# EAGLE board mcu_block.job (EAGLE 6.5.0)
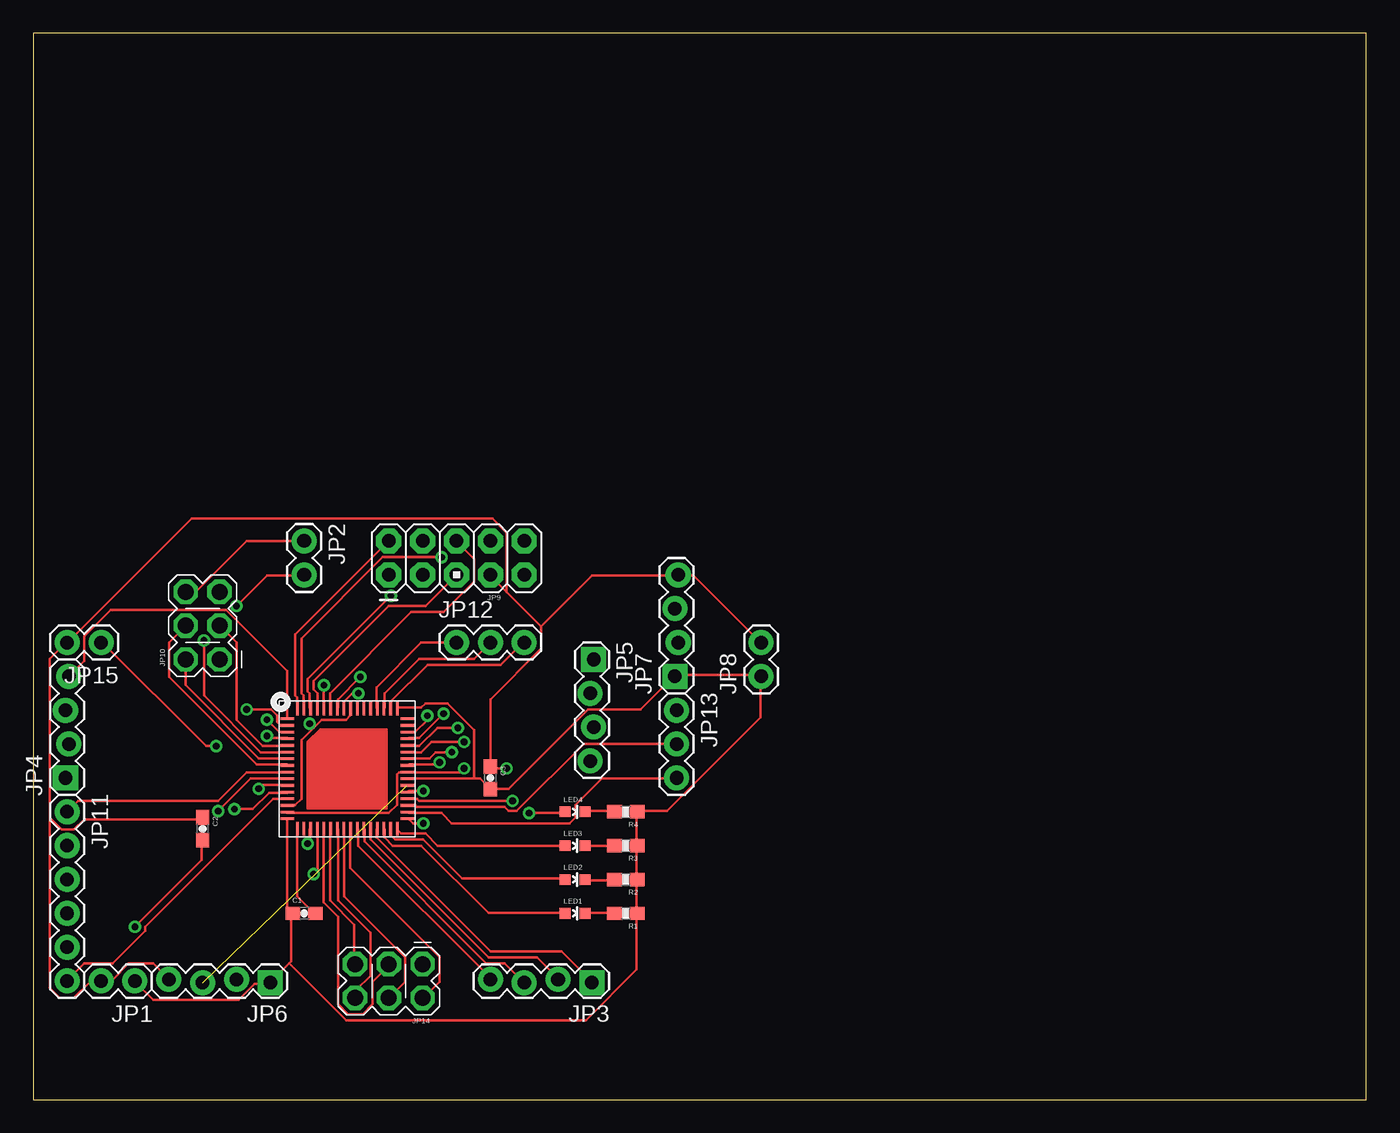
[diagram p0: board, top side]
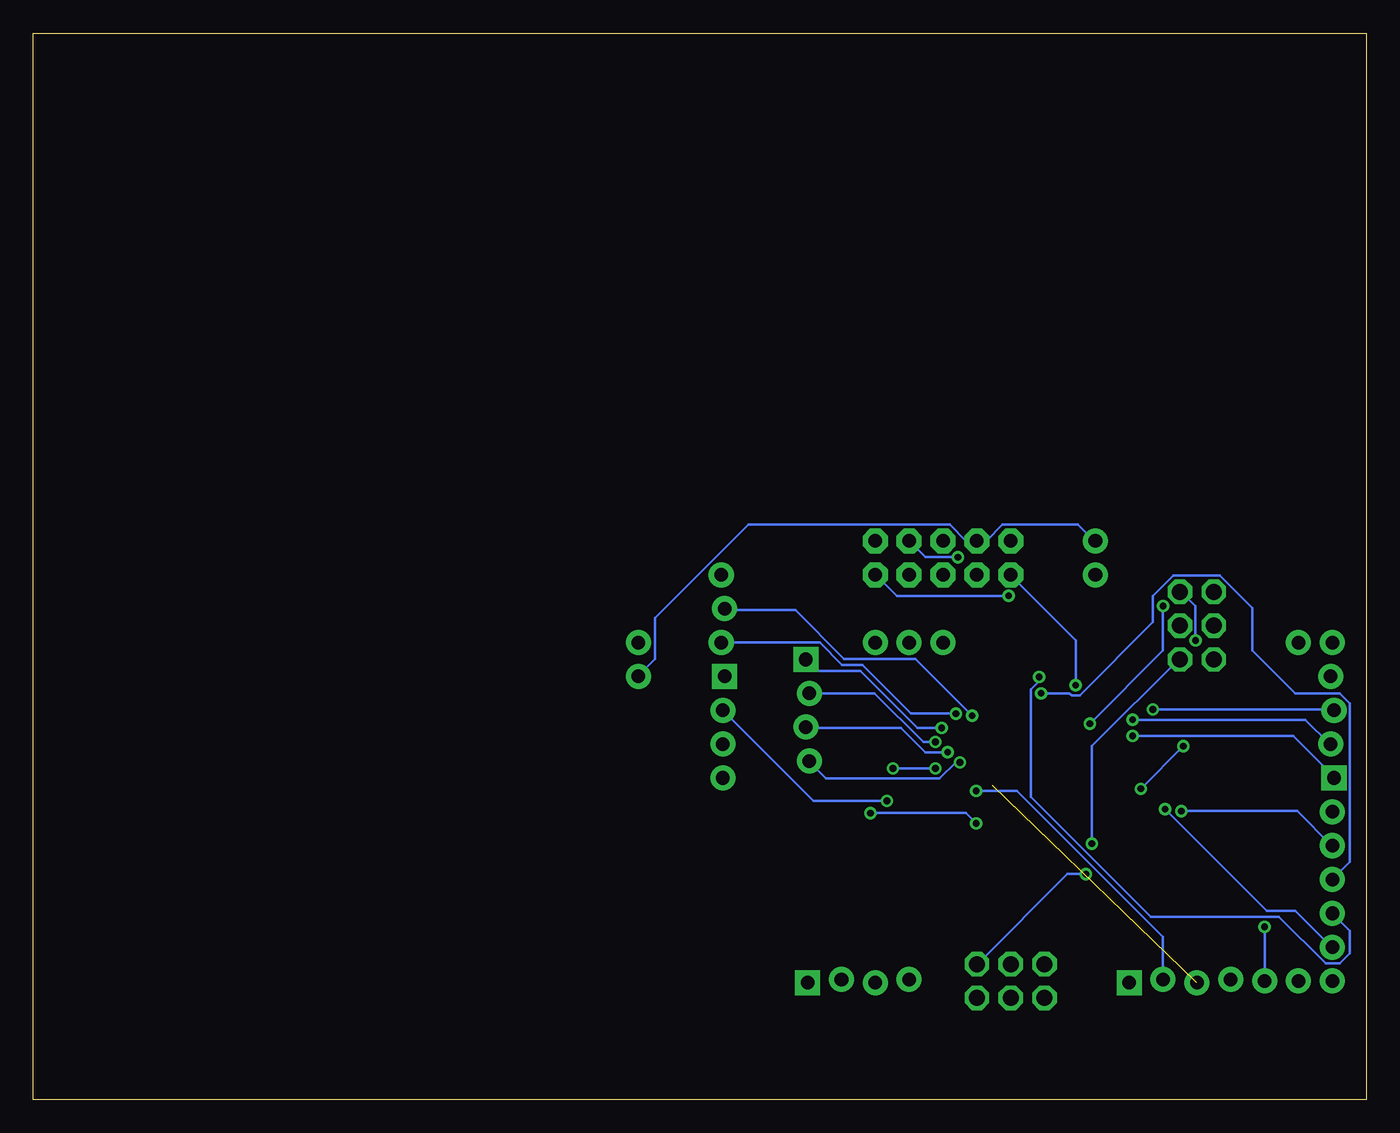
[diagram p1: board, bottom side, seen from below]

Size 100 x 80 mm. Coordinates in mm from the lower left corner, seen from the top.
Outline: 0,0 100,0 100,80 0,80 0,0
Copper layers (1*16): Top 0.035mm / dielectric 1.5mm / Bottom 0.035mm
Design rules "default *": minimum track width 8mil, minimum drill 20mil, track to track 6mil, track to pad 6mil, pad to pad 6mil, via to via 8mil, smd to smd 6mil, copper to edge 40mil, drill to drill 8mil, minimum pad ring 10mil, minimum via ring 8mil, stop-mask expansion 3mil, vias tented up to drill 0mil, thermal gap 10mil

## Footprints (pad centres in the part's own frame; a part is rotated, then mirrored left to right if it is on the bottom)
0603-CAP = smd 1.1 x 1: 1 -0.85,0; 2 0.85,0
1X02 = drill 1.016 pad 1.88: 1 0,0; 2 2.54,0
1X04_LOCK = drill 1.016 pad 1.88 square: 1 0,0.127 | drill 1.016 pad 1.88: 2 2.54,-0.127; 3 5.08,0.127; 4 7.62,-0.127
AVR_ICSP = drill 1.016 pad 1.88 octagon: 1 -1.27,5.08; 2 1.27,5.08; 3 -1.27,2.54; 4 1.27,2.54; 5 -1.27,0; 6 1.27,0; 7 -1.27,-2.54; 8 1.27,-2.54; 9 -1.27,-5.08; 10 1.27,-5.08
2X3_POGO = drill 1.2 pad 1.829 octagon: P$1 0,0; P$2 0,2.54; P$3 2.54,0; P$4 2.54,2.54; P$5 5.08,0; P$6 5.08,2.54
1X06 = drill 1.016 pad 1.88: 1 0,0; 2 2.54,0; 3 5.08,0; 4 7.62,0; 5 10.16,0; 6 12.7,0
1X03 = drill 1.016 pad 1.88: 1 0,0; 2 2.54,0; 3 5.08,0
LED-0603 = smd 0.8 x 0.8: A 0,-0.75; C 0,0.75
0603-RES = smd 1.1 x 1: 1 -0.85,0; 2 0.85,0
VQFN_RGC_64PIN = smd 1 x 0.2: 1 0,8.25; 2 0,7.75; 3 0,7.25; 4 0,6.75; 5 0,6.25; 6 0,5.75; 7 0,5.25; 8 0,4.75; 9 0,4.25; 10 0,3.75; 11 0,3.25; 12 0,2.75; 13 0,2.25; 14 0,1.75; 15 0,1.25; 16 0,0.75; 33 9,0.75; 34 9,1.25; 35 9,1.75; 36 9,2.25; 37 9,2.75; 38 9,3.25; 39 9,3.75; 40 9,4.25; 41 9,4.75; 42 9,5.25; 43 9,5.75; 44 9,6.25; 45 9,6.75; 46 9,7.25; 47 9,7.75; 48 9,8.25 | smd 0.2 x 1: 17 0.75,0; 18 1.25,0; 19 1.75,0; 20 2.25,0; 21 2.75,0; 22 3.25,0; 23 3.75,0; 24 4.25,0; 25 4.75,0; 26 5.25,0; 27 5.75,0; 28 6.25,0; 29 6.75,0; 30 7.25,0; 31 7.75,0; 32 8.25,0; 49 8.25,9; 50 7.75,9; 51 7.25,9; 52 6.75,9; 53 6.25,9; 54 5.75,9; 55 5.25,9; 56 4.75,9; 57 4.25,9; 58 3.75,9; 59 3.25,9; 60 2.75,9; 61 2.25,9; 62 1.75,9; 63 1.25,9; 64 0.75,9

## Placement (x,y rotation side)
C1  470nF  [0603-CAP]  20.32,13.97 0 top
C2  0.1uF  [0603-CAP]  12.7,20.32 270 top
C3  0.1uF  [0603-CAP]  34.29,24.13 270 top
JP1  M02PTH  [1X02]  7.62,8.89 180 top
JP2  M02PTH  [1X02]  20.32,41.91 270 top
JP3  [1X04_LOCK]  41.91,8.89 180 top
JP4  [1X04_LOCK]  2.54,24.13 90 top
JP5  [1X04_LOCK]  41.91,33.02 270 top
JP6  [1X04_LOCK]  17.78,8.89 180 top
JP7  [1X04_LOCK]  48.26,31.75 90 top
JP8  M02PTH  [1X02]  54.61,31.75 90 top
JP9  M05X2PTH  [AVR_ICSP]  31.75,40.64 90 top
JP10  [2X3_POGO]  13.97,33.02 90 top
JP11  [1X06]  2.54,21.59 270 top
JP12  [1X03]  31.75,34.29 0 top
JP13  [1X03]  48.26,29.21 270 top
JP14  [2X3_POGO]  29.21,10.16 180 top
JP15  M02PTH  [1X02]  5.08,34.29 180 top
LED1  [LED-0603]  40.64,13.97 270 top
LED2  [LED-0603]  40.64,16.51 270 top
LED3  [LED-0603]  40.64,19.05 270 top
LED4  [LED-0603]  40.64,21.59 270 top
R1  1.5K  [0603-RES]  44.45,13.97 180 top
R2  1.5K  [0603-RES]  44.45,16.51 180 top
R3  1.5K  [0603-RES]  44.45,19.05 180 top
R4  1.5K  [0603-RES]  44.45,21.59 180 top
U$1  MSP430F5528  [VQFN_RGC_64PIN]  19.05,20.32 0 top

## Library data of the parts
C1-C3 = SparkFun-Capacitors
JP1-JP9 JP11-JP13 JP15 = SparkFun-Connectors
JP10 JP14 = SparkFun-Connectors; PROD_ID: HW-11044
LED1-LED4 = SparkFun-LED
R1-R4 = SparkFun-Passives
U$1 = TuansLib

## Nets
ADC_0: JP4.4 U$1.1
ADC_1: JP4.3 U$1.2
ADC_2: JP4.2 U$1.3
ADC_3: JP4.1 U$1.4
AGND: JP2.2 U$1.14 U$1.56
AVCC: JP15.1 U$1.11
BTN_0: JP3.4 U$1.26
BTN_1: JP3.3 U$1.27
BTN_2: JP3.2 U$1.28
BTN_3: JP3.1 U$1.29
DGND: C1.1 C2.2 C3.2 JP1.1 JP2.1 JP6.1 JP7.1 JP8.1 JP9.4 JP10.P$6 R1.1 R2.1 R3.1 R4.1 U$1.16 U$1.39 U$1.49
DISP_BORDER: JP10.P$2 U$1.7
DISP_BUSY: JP10.P$3 U$1.5
DISP_DISCHRG: JP10.P$4 U$1.8
DISP_PWM: JP10.P$1 U$1.19
DISP_RST: JP10.P$5 U$1.6
LED_0: LED1.A U$1.30
LED_1: LED2.A U$1.31
LED_2: LED3.A U$1.32
LED_3: LED4.A U$1.33
N$1: C1.2 U$1.17
N$2: LED4.C R4.2
N$3: JP9.3
N$4: JP11.1 U$1.9
N$5: JP11.2 U$1.10
N$6: JP11.3 U$1.57
N$7: JP11.4 U$1.58
N$8: JP11.5 U$1.12
N$9: JP11.6 U$1.13
N$10: JP12.3 U$1.50
N$11: JP9.10
N$12: JP12.2 U$1.51
N$13: JP12.1 U$1.52
N$14: JP13.1 U$1.36
N$15: JP13.2 U$1.35
N$16: JP13.3 U$1.34
N$17: LED3.C R3.2
N$18: LED2.C R2.2
N$19: LED1.C R1.2
PWR_CE: JP14.P$1 U$1.20
PWR_FPWM: JP14.P$3 U$1.21
PWR_ISET2: JP14.P$4 U$1.24
PWR_PG: JP14.P$2 U$1.25
PWR_STAT1: JP14.P$5 U$1.22
PWR_STAT2: JP14.P$6 U$1.23
RST/NMI/SBWTDIO: JP9.2 U$1.64
SPI_CLK: JP5.1 U$1.44
SPI_MISO: JP5.2 U$1.43
SPI_MOSI: JP5.3 U$1.42
SPI_STE: JP5.4 U$1.41
TCK: JP9.8 U$1.63
TDI: JP9.5 U$1.61
TDO: JP9.1 U$1.60
TEST/SBWTCK: JP9.6 U$1.59
TMS: JP9.9 U$1.62
USART0_RX: JP6.3 U$1.38
USART0_TX: JP6.2 U$1.37
USART1_RX: JP7.3 U$1.46
USART1_TX: JP7.2 U$1.45
VCC: C2.1 C3.1 JP1.2 JP6.4 JP7.4 JP8.2 JP9.7 JP15.2 U$1.15 U$1.40

## Tracks (layer width: path | path; a pad name or v marks a point on that pad's centre or on a via)
ADC_0
  Top 0.203: U$1.1 19.05,32.16 14.48,36.73 5.79,36.73 3.81,34.75 3.81,32.92 2.74,31.85 JP4.4
ADC_1  (via drill 0.51)
  Top 0.203: v16,29.26 17.83,29.26 18.29,28.8 18.29,28.35 18.59,28.04 19.05,28.04 U$1.2
  Bottom 0.203: v16,29.26 2.44,29.26 JP4.3
ADC_2  (via drill 0.51)
  Top 0.203: v17.53,28.5 18.44,27.58 19.05,27.58 U$1.3
  Bottom 0.203: v17.53,28.5 4.57,28.5 2.74,26.67 JP4.2
ADC_3  (via drill 0.51)
  Top 0.203: v17.53,27.28 17.68,27.13 19.05,27.13 U$1.4
  Bottom 0.203: v17.53,27.28 5.49,27.28 2.44,24.23 JP4.1
AGND  (via drill 0.51)
  Top 0.203: 21.03,27.89 21.64,28.5 23.47,28.5 23.77,28.8 23.77,29.26 U$1.56 | 21.03,27.89 20.12,26.98 20.12,22.55 19.66,22.1 19.05,22.1 U$1.14 | v15.24,37.03 17.53,39.32 20.27,39.32 JP2.2 | 21.03,27.89 v20.73,28.19
  Bottom 0.203: v15.24,37.03 15.24,33.68 v20.73,28.19
AVCC  (via drill 0.51)
  Top 0.203: v16.92,23.32 17.22,23.62 19.05,23.62 U$1.11 | v13.72,26.52 12.95,26.52 5.18,34.29 JP15.1
  Bottom 0.203: v13.72,26.52 v16.92,23.32
BTN_0
  Top 0.203: U$1.26 24.38,20.27 24.38,19.05 34.29,9.14 JP3.4
BTN_1
  Top 0.203: U$1.27 24.84,20.27 24.84,19.36 33.98,10.21 35.36,10.21 36.73,8.84 JP3.3
BTN_2
  Top 0.203: U$1.28 25.3,20.27 25.3,19.51 34.14,10.67 37.8,10.67 39.32,9.14 JP3.2
BTN_3
  Top 0.203: U$1.29 25.76,20.27 25.76,19.66 34.29,11.12 39.62,11.12 41.91,8.84 JP3.1
DGND  (via drill 0.51)
  Top 0.203: JP10.P$6 12.19,38.1 16,41.91 JP2.1 | U$1.16 19.05,14.33 19.36,14.02 C1.1 19.36,13.87 19.36,10.36 19.2,10.21 | 19.2,10.21 17.83,8.84 JP6.1 17.68,8.69 16.61,8.69 15.39,7.47 8.99,7.47 7.62,8.84 JP1.1 | v7.62,12.95 12.65,17.98 12.65,19.36 C2.2 | 33.07,24.08 33.53,24.08 34.29,23.32 | 33.07,24.08 28.19,24.08 U$1.39 | 33.07,24.08 33.07,27.74 31.09,29.72 29.41,29.72 29.11,29.41 27.28,29.41 U$1.49 | 45.26,19.05 45.26,21.49 R4.1 45.41,21.64 47.55,21.64 54.56,28.65 54.56,31.7 JP8.1 54.56,31.85 48.16,31.85 JP7.1 48.01,31.7 45.57,29.26 41.6,29.26 35.66,23.32 34.29,23.32 | 45.26,19.05 45.26,16.61 R2.1 45.26,16.46 45.26,14.02 R1.1 45.26,13.87 45.26,9.75 41.45,5.94 23.47,5.94 19.2,10.21 | 45.26,19.05 R3.1 | 34.29,23.32 C3.2
  Bottom 0.203: JP2.1 20.42,41.91 21.64,43.13 27.28,43.13 28.5,41.91 JP9.4 30.02,41.91 31.24,43.13 46.33,43.13 53.34,36.12 53.34,33.07 54.56,31.85 JP8.1 | JP1.1 v7.62,12.95
DISP_BORDER
  Top 0.203: JP10.P$2 11.43,31.09 16.92,25.6 19.05,25.6 U$1.7
DISP_BUSY
  Top 0.203: JP10.P$3 15.24,34.29 15.24,28.5 17.22,26.52 19.05,26.52 U$1.5
DISP_DISCHRG
  Top 0.203: U$1.8 19.05,25.15 16.76,25.15 10.21,31.7 10.21,34.29 11.43,35.51 JP10.P$4
DISP_PWM  (via drill 0.51)
  Top 0.203: v20.57,19.2 20.73,19.36 20.73,20.27 U$1.19
  Bottom 0.203: v20.57,19.2 20.57,26.52 14.02,33.07 JP10.P$1
DISP_RST  (via drill 0.51)
  Top 0.203: v12.8,34.44 12.8,30.33 17.07,26.06 U$1.6
  Bottom 0.203: v12.8,34.44 12.8,37.03 13.87,38.1 JP10.P$5
LED_0
  Top 0.203: LED1.A 39.78,14.02 34.14,14.02 29.11,19.05 26.98,19.05 26.36,19.66 26.36,20.27 U$1.30
LED_1
  Top 0.203: LED2.A 39.78,16.61 32.16,16.61 29.26,19.51 27.13,19.51 26.82,19.81 26.82,20.27 U$1.31
LED_2
  Top 0.203: LED3.A 30.33,19.05 29.41,19.96 27.58,19.96 27.28,20.27 U$1.32
LED_3  (via drill 0.51)
  Top 0.203: v37.19,21.49 39.78,21.49 LED4.A | v29.26,20.73 28.5,20.73 28.19,21.03 U$1.33
  Bottom 0.203: v37.19,21.49 30.02,21.49 v29.26,20.73
N$1
  Top 0.203: U$1.17 19.81,20.27 19.81,15.24 21.03,14.02 C1.2
N$2
  Top 0.203: LED4.C 41.45,21.64 43.59,21.64 R4.2
N$4
  Top 0.203: JP11.1 3.35,22.4 13.87,22.4 16,24.54 19.05,24.54 U$1.9
N$5  (via drill 0.51)
  Top 0.203: v13.87,21.64 16.31,24.08 U$1.10
  Bottom 0.203: v13.87,21.64 5.18,21.64 2.59,19.05 JP11.2
N$6  (via drill 0.51)
  Top 0.203: v24.38,30.48 23.93,30.48 23.32,29.87 23.32,29.41 U$1.57
  Bottom 0.203: v24.38,30.48 22.25,30.48 22.1,30.33 21.49,30.33 16,35.81 16,37.8 14.48,39.32 10.97,39.32 8.53,36.88 8.53,33.68 5.33,30.48 1.98,30.48 1.22,29.72 1.22,17.83 JP11.3
N$7  (via drill 0.51)
  Top 0.203: v24.54,31.7 22.86,30.02 22.86,29.41 U$1.58
  Bottom 0.203: v24.54,31.7 24.54,31.39 25.15,30.79 25.15,22.71 16.15,13.72 6.55,13.72 3.05,10.21 1.98,10.21 1.22,10.97 1.22,12.65 JP11.4
N$8  (via drill 0.51)
  Top 0.203: v15.09,21.79 16.46,21.79 17.68,23.01 19.05,23.01 U$1.12
  Bottom 0.203: v15.09,21.79 7.47,14.17 5.33,14.17 2.59,11.43 JP11.5
N$9
  Top 0.203: U$1.13 19.05,22.55 17.98,22.55 8.38,12.95 8.38,12.65 5.94,10.21 3.81,10.21 2.59,8.99 JP11.6
N$10
  Top 0.203: U$1.50 26.82,29.41 26.82,29.87 29.57,32.61 35.05,32.61 36.73,34.29 JP12.3
N$12
  Top 0.203: JP12.2 33.07,33.07 28.96,33.07 26.36,30.48 26.36,29.41 U$1.51
N$13
  Top 0.203: JP12.1 29.11,34.29 25.76,30.94 25.76,29.41 U$1.52
N$14  (via drill 0.51)
  Top 0.203: v35.97,22.4 28.96,22.4 28.8,22.55 28.19,22.55 U$1.36
  Bottom 0.203: v35.97,22.4 41.45,22.4 JP13.1
N$15
  Top 0.203: JP13.2 41.3,26.67 36.27,21.64 35.66,21.64 35.36,21.95 28.8,21.95 28.65,22.1 28.19,22.1 U$1.35
N$16
  Top 0.203: U$1.34 28.19,21.49 30.63,21.49 31.39,20.73 40.23,20.73 40.69,21.18 40.69,22.1 42.67,24.08 48.16,24.08 JP13.3
N$17
  Top 0.203: R3.2 LED3.C
N$18
  Top 0.203: LED2.C 41.45,16.46 43.59,16.46 R2.2
N$19
  Top 0.203: LED1.C 41.45,14.02 43.59,14.02 R1.2
PWR_CE  (via drill 0.51)
  Top 0.203: v21.03,16.92 21.34,17.22 21.34,20.27 U$1.20
  Bottom 0.203: v21.03,16.92 22.4,16.92 29.11,10.21 JP14.P$1
PWR_FPWM
  Top 0.203: U$1.21 21.79,20.27 21.79,14.78 22.86,13.72 22.86,7.16 23.62,6.4 24.69,6.4 25.45,7.16 25.45,8.84 26.67,10.06 JP14.P$3
PWR_ISET2
  Top 0.203: JP14.P$4 27.89,8.84 27.89,10.67 23.32,15.24 23.32,20.27 U$1.24
PWR_PG
  Top 0.203: U$1.25 23.77,20.27 23.77,17.37 30.48,10.67 30.48,8.84 29.26,7.62 JP14.P$2
PWR_STAT1
  Top 0.203: U$1.22 22.25,20.27 22.25,14.94 24.08,13.11 24.08,10.21 JP14.P$5
PWR_STAT2
  Top 0.203: U$1.23 22.86,20.27 22.86,14.94 25.3,12.5 25.3,9.3 24.23,8.23 24.23,7.62 JP14.P$6
RST/NMI/SBWTDIO
  Top 0.203: JP9.2 19.66,34.9 19.66,30.33 19.81,30.18 19.81,29.41 U$1.64
SPI_CLK  (via drill 0.51)
  Top 0.203: v31.85,27.89 30.33,27.89 28.96,26.52 28.19,26.52 U$1.44
  Bottom 0.203: v31.85,27.89 33.68,27.89 37.95,32.16 41.15,32.16 41.91,32.92 JP5.1
SPI_MISO  (via drill 0.51)
  Top 0.203: v32.31,26.82 29.87,26.82 29.11,26.06 28.19,26.06 U$1.43
  Bottom 0.203: v32.31,26.82 33.22,26.82 36.88,30.48 JP5.2
SPI_MOSI  (via drill 0.51)
  Top 0.203: v31.39,26.06 30.18,26.06 29.72,25.6 28.19,25.6 U$1.42
  Bottom 0.203: v31.39,26.06 33.07,26.06 34.9,27.89 41.91,27.89 JP5.3
SPI_STE  (via drill 0.51)
  Top 0.203: v30.48,25.3 30.33,25.15 28.19,25.15 U$1.41
  Bottom 0.203: v30.48,25.3 30.79,25.3 32,24.08 40.54,24.08 41.76,25.3 JP5.4
TCK  (via drill 0.51)
  Top 0.203: v30.63,40.69 26.21,40.69 20.12,34.59 20.12,30.48 20.27,30.33 20.27,29.41 U$1.63
  Bottom 0.203: v30.63,40.69 33.07,40.69 JP9.8
TDI
  Top 0.203: JP9.5 29.41,37.03 26.67,37.03 21.03,31.39 21.03,30.79 21.34,30.48 21.34,29.41 U$1.61
TDO  (via drill 0.51)
  Top 0.203: v21.79,31.09 21.79,29.41 U$1.60
  Bottom 0.203: v21.79,31.09 21.79,34.44 26.67,39.32 JP9.1
TEST/SBWTCK
  Top 0.203: U$1.59 22.25,29.41 22.25,30.48 28.35,36.58 30.79,36.58 33.07,38.86 33.07,40.54 31.7,41.91 JP9.6
TMS  (via drill 0.51)
  Top 0.203: v26.82,37.8 20.57,31.55 20.57,30.63 20.73,30.48 20.73,29.41 U$1.62
  Bottom 0.203: v26.82,37.8 35.2,37.8 36.73,39.32 JP9.9
USART0_RX  (1 unrouted)
USART0_TX  (via drill 0.51)
  Top 0.203: v29.26,23.16 28.19,23.16 U$1.37
  Bottom 0.203: v29.26,23.16 26.21,23.16 15.24,12.19 JP6.2
USART1_RX  (via drill 0.51)
  Top 0.203: v29.57,28.8 29.57,28.5 28.65,27.58 28.19,27.58 U$1.46
  Bottom 0.203: v29.57,28.8 33.83,33.07 39.17,33.07 42.82,36.73 48.01,36.73 JP7.3
USART1_TX  (via drill 0.51)
  Top 0.203: v30.79,28.96 28.96,27.13 28.19,27.13 U$1.45
  Bottom 0.203: v30.79,28.96 34.14,28.96 37.8,32.61 39.32,32.61 41,34.29 JP7.2
VCC  (via drill 0.51)
  Top 0.203: JP6.4 10.06,9.14 8.99,10.21 7.16,10.21 5.94,8.99 5.18,8.99 JP1.2 5.03,8.84 4.27,8.84 3.05,7.62 1.98,7.62 1.22,8.38 1.22,21.18 | 1.22,21.18 2.13,20.27 3.05,20.27 3.81,21.03 12.65,21.03 C2.1 | 1.22,21.18 1.22,33.07 2.44,34.29 JP15.2 2.59,34.29 11.89,43.59 34.44,43.59 35.51,42.52 35.51,38.1 | JP8.2 54.56,34.29 49.53,39.32 48.46,39.32 JP7.4 48.31,39.32 41.91,39.32 38.1,35.51 | U$1.15 19.05,21.49 26.67,21.49 27.28,22.1 27.28,24.38 27.43,24.54 28.04,24.54 U$1.40 28.19,24.54 32,24.54 v32.31,24.84 | 38.1,35.51 38.1,33.83 34.29,30.02 C3.1 34.29,24.84 v35.51,24.84 | 35.51,38.1 34.29,39.32 JP9.7 | 35.51,38.1 38.1,35.51
  Bottom 0.203: v35.51,24.84 v32.31,24.84